# Altium PCB AdapterBoard.PcbDoc
Units mil, origin at the board's own origin, x right, y up, seen from the top; angles counter-clockwise.
Board outline 2007.09 x 1181.1 mil, 4 copper layers (Top Layer, Mid Layer 1, Mid Layer 2, Bottom Layer), stack 31.2 mil thick; 51 components, 29 nets, 160 pads, 131 vias.
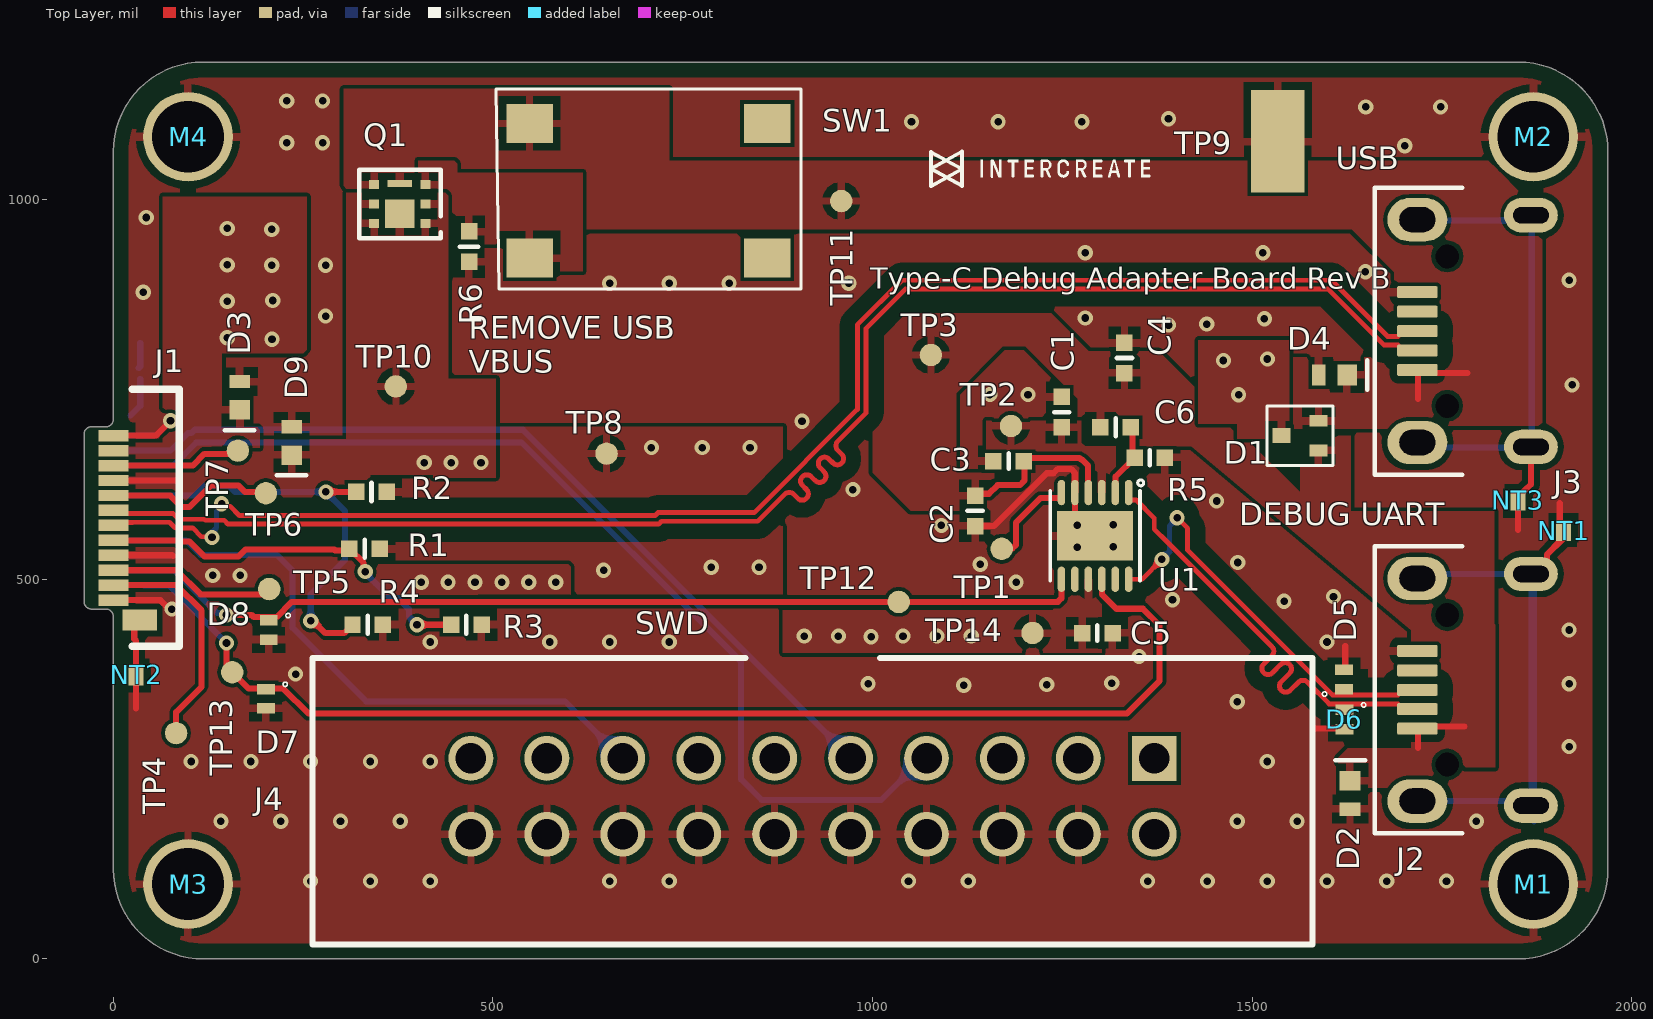
[diagram p0: Top Layer view]
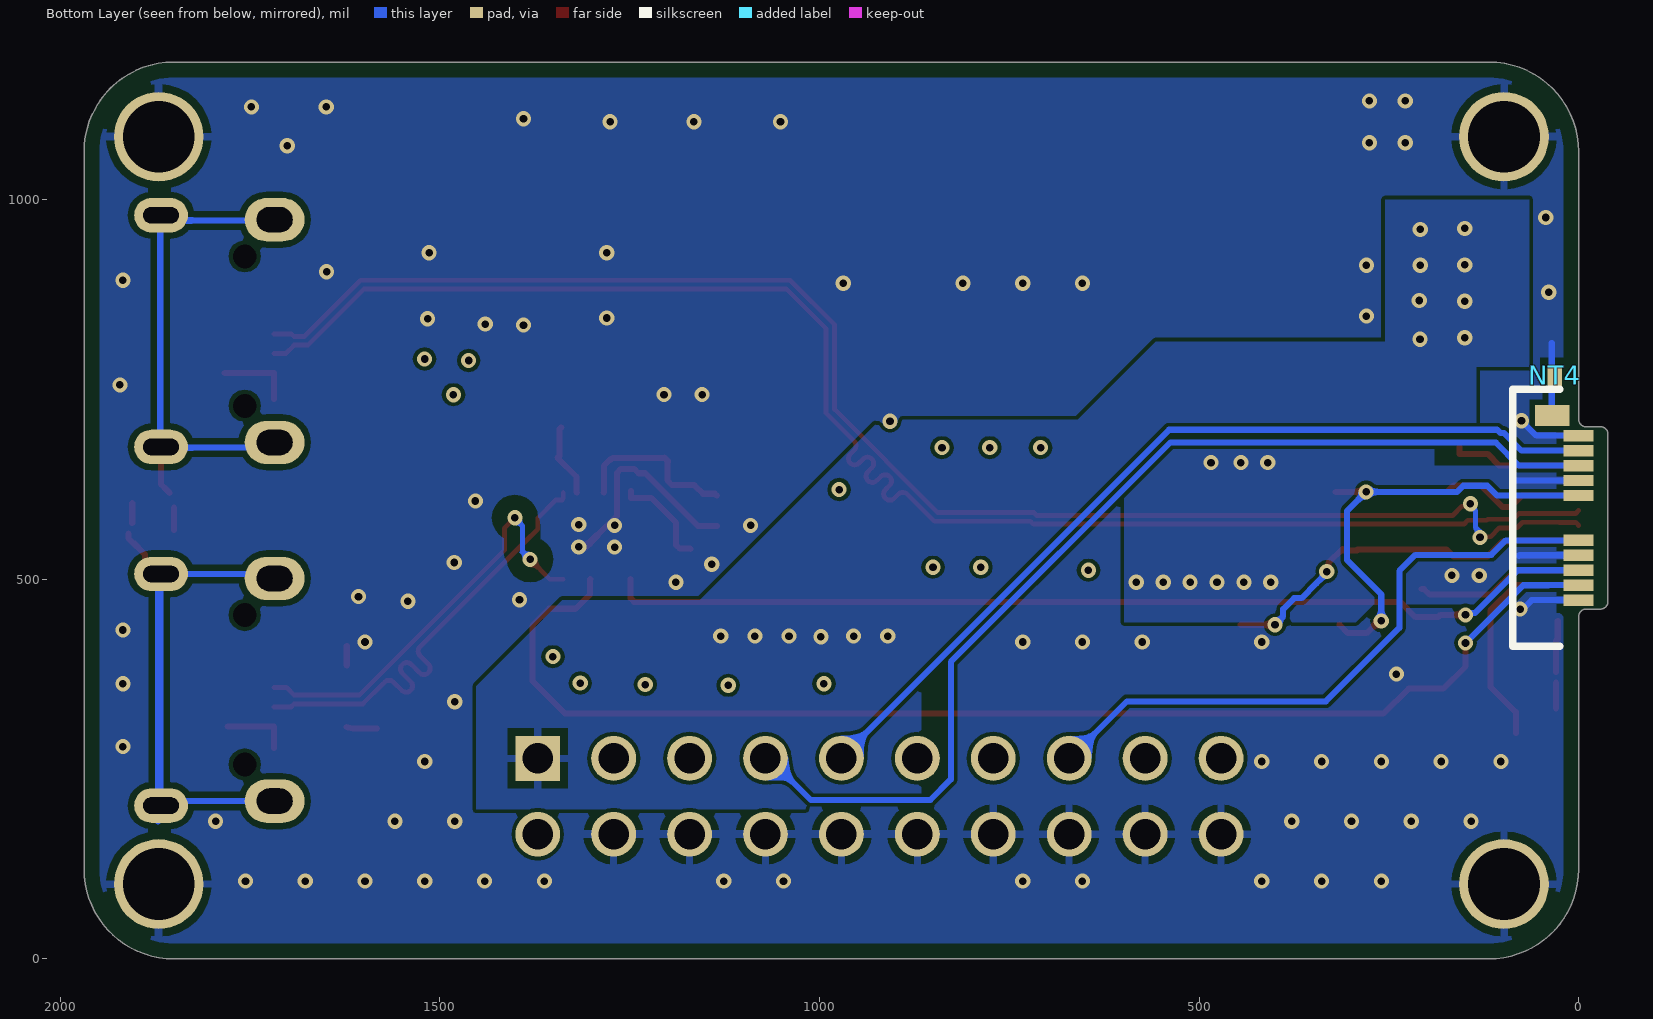
[diagram p1: Bottom Layer view, seen from below]
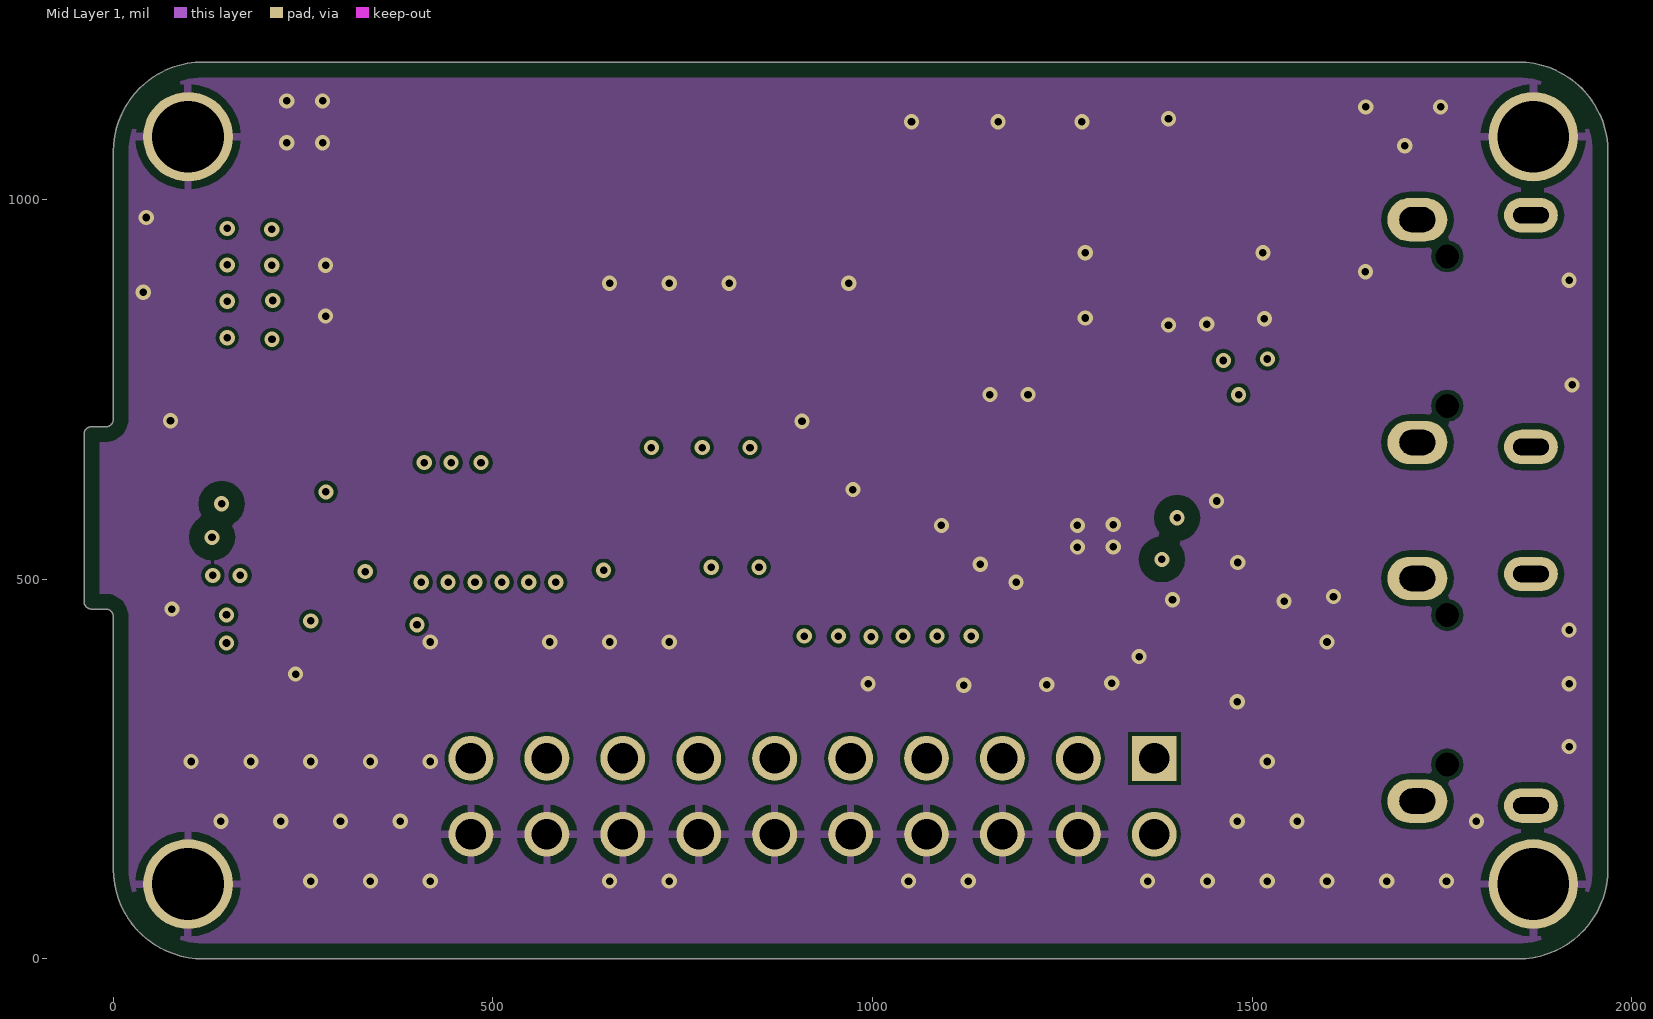
[diagram p2: Mid Layer 1]
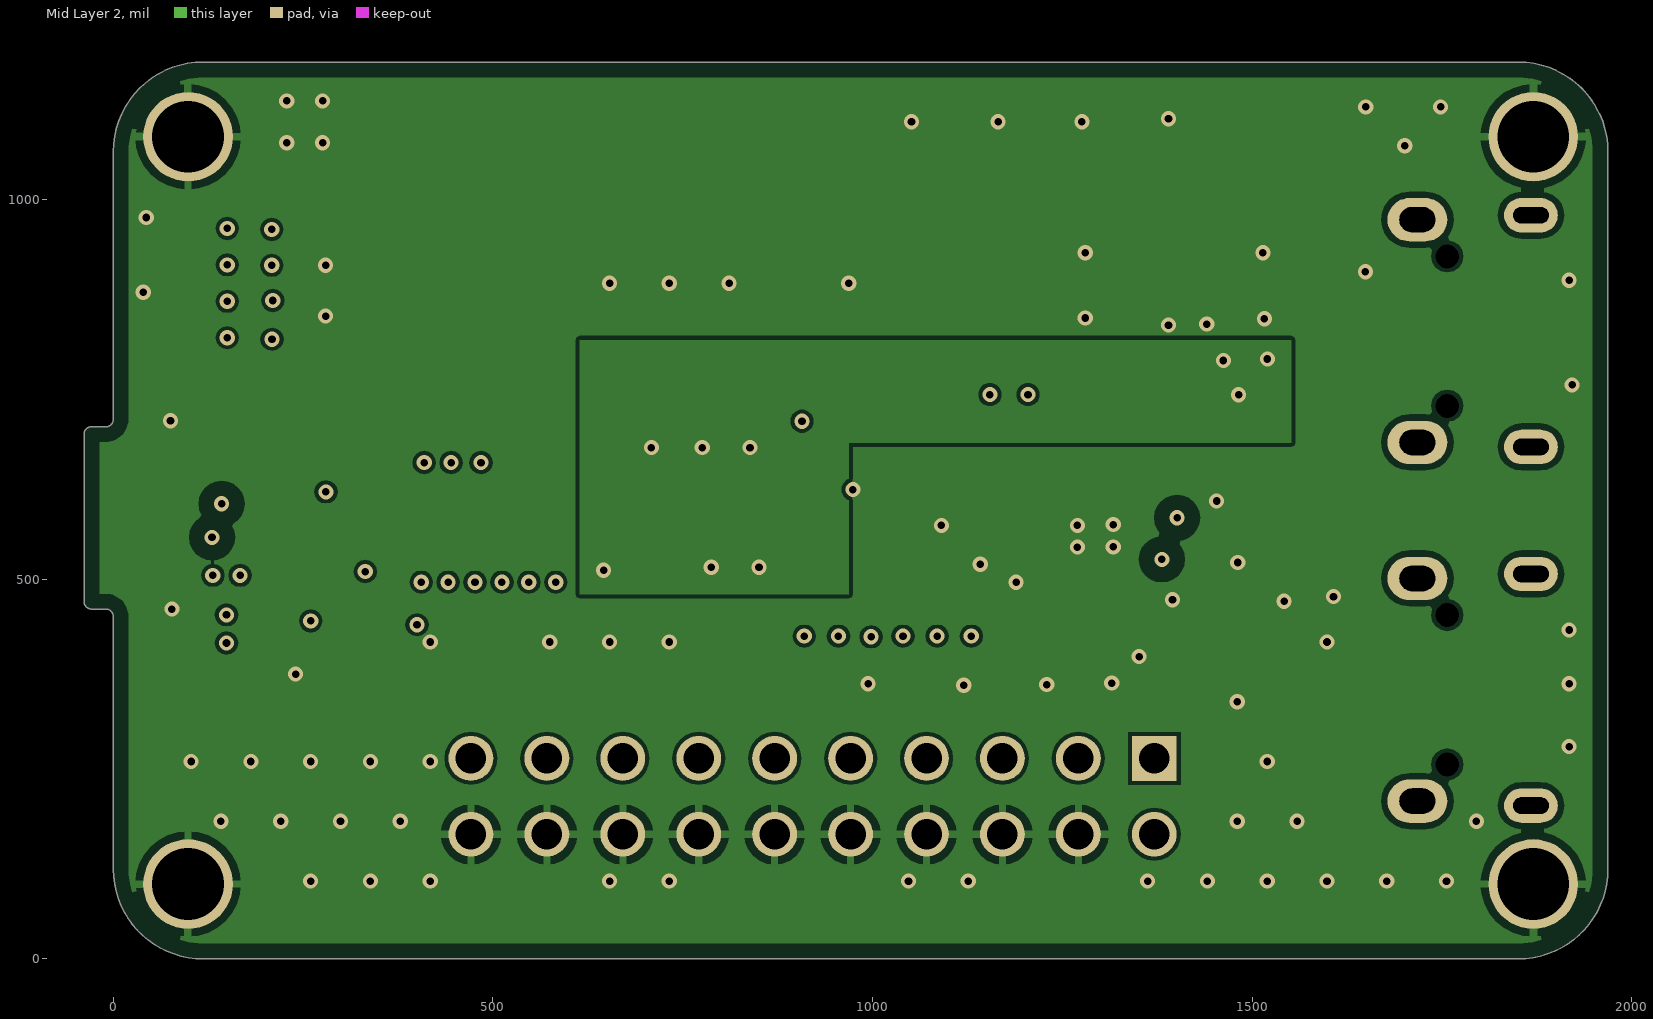
[diagram p3: Mid Layer 2]

## Layer stack, top to bottom
Top Solder: solder mask 0.6, Solder Resist, Dk 3.5
Top Layer: signal copper 1.9
Top Prepreg: prepreg 5.3, Dk 4.2
Mid Layer 1: signal copper 1.4
Bottom Core: core 14, Dk 4.2
Mid Layer 2: signal copper 1.4
Bottom Prepreg: prepreg 5.3, Dk 4.2
Bottom Layer: signal copper 1.9
Bottom Solder: solder mask 0.6, Solder Resist, Dk 3.5

## Board outline
-28.74,460.63 cw(c-28.74,470.47) -38.58,470.47 -38.58,690.94 cw(c-28.74,690.94) -28.74,700.79 -9.84,700.79 ccw(c-9.84,710.63) 0,710.63 0,1062.99 cw(c118.11,1062.99) 118.11,1181.1 1850.39,1181.1 cw(c1850.39,1062.99) 1968.5,1062.99 1968.5,118.11 cw(c1850.39,118.11) 1850.39,0 118.11,0 cw(c118.11,118.11) 0,118.11 0,450.79 ccw(c-9.84,450.79) -9.84,460.63

## Design rules (kind name [scope] priority, off if disabled: settings)
BoardOutlineClearance [All] p1: gap=20 ignorepadtopadclearanceinfootprint=FALSE except(4: SMDPad-OutlineEdge; 5: Text-OutlineEdge; 10: Track-OutlineEdge; 15: Arc-OutlineEdge)
Clearance Clearance_5 [InAnyDifferentialPair vs InPolygon] p1: gap=20 ignorepadtopadclearanceinfootprint=TRUE
Clearance Clearance_4 [InNet('NetJ1_ME2') vs InNet('GND')] p2: gap=8.03 ignorepadtopadclearanceinfootprint=TRUE except(0: Arc-SMDPad Track-SMDPad; 5: Arc-Arc Arc-Track Track-Track)
Clearance Clearance_3 [InNet('NetJ1_ME1') vs InNet('GND')] p3: gap=8.03 ignorepadtopadclearanceinfootprint=TRUE except(0: Arc-SMDPad Track-SMDPad; 5: Arc-Arc Arc-Track Track-Track)
Clearance Clearance_2 [InNet('NetJ2_6') vs InNet('GND')] p4: gap=8.03 ignorepadtopadclearanceinfootprint=TRUE except(0: Arc-SMDPad Track-SMDPad; 5: Arc-Arc Arc-Track Track-Track)
Clearance Clearance_1 [InNet('NetJ3_6') vs InNet('GND')] p5: gap=8.03 ignorepadtopadclearanceinfootprint=TRUE except(0: Arc-SMDPad Track-SMDPad; 5: Arc-Arc Arc-Track Track-Track)
Clearance [All] p6: gap=5 ignorepadtopadclearanceinfootprint=TRUE
DiffPairsRouting [InDifferentialPairClass('All Differential Pairs')] p1: maxlimit=5 minlimit=5 mostfreqgap=5 toplayer_minwidth=6.43 toplayer_maxwidth=6.43 toplayer_prefwidth=6.43 midlayer1_minwidth=3.68 midlayer1_maxwidth=3.68 midlayer1_prefwidth=3.68 midlayer2_minwidth=3.68 midlayer2_maxwidth=3.68 midlayer2_prefwidth=3.68 bottomlayer_minwidth=6.43 bottomlayer_maxwidth=6.43 bottomlayer_prefwidth=6.43 impedanceprofiledriven=TRUE impedanceprofileid={990C3832-9597-482B-A725-3B3A123B4834} impedanceprofilevalue=90.000000 maxuncoupledlength=500
HoleSize [All] p1: absolutevalues=TRUE maxlimit=196.85 minlimit=10 maxpercent=80.000 minpercent=20.000
MatchedLengths [InDifferentialPairClass('All Differential Pairs')] p1: tolerance=50 checknetsindiffpair=TRUE checkdiffpairvsdiffpair=FALSE checkxsignals=FALSE checkothers=FALSE
MaximumViaCount [InDifferentialPairClass('All Differential Pairs')] p1: limit=4
MinimumSolderMaskSliver [All] p1: minsoldermaskwidth=5
PlaneConnect [All] p1: pad.planeconnectstyle=Relief pad.reliefexpansion=20 pad.reliefentries=4 pad.reliefconductorwidth=10 pad.reliefairgap=10 via.planeconnectstyle=Direct via.reliefexpansion=20 via.reliefentries=4 via.reliefconductorwidth=10 via.reliefairgap=10
PolygonConnect [All] p1: thpad.connectstyle=Relief thpad.reliefconductorwidth=10 thpad.reliefentries=4 thpad.polygonreliefangle="90 Angle" thpad.airgapwidth=10 smdpad.connectstyle=Relief smdpad.reliefconductorwidth=10 smdpad.reliefentries=4 smdpad.polygonreliefangle="90 Angle" smdpad.airgapwidth=10 via.connectstyle=Direct via.reliefconductorwidth=10 via.reliefentries=4 via.polygonreliefangle="90 Angle" via.airgapwidth=10
RoutingVias [All] p1: holewidth=10 width=20 viastyle="Through Hole" minholewidth=10 minwidth=20 maxholewidth=19.68 maxwidth=50
ShortCircuit ShortCircuit_1 [InNet('NetJ3_6') vs InNet('GND')] p1: allowed=TRUE
ShortCircuit [All] p2: allowed=FALSE
SilkToSolderMaskClearance [IsPad] p1: minsilkscreentomaskgap=5 clearancetoexposedcopper=TRUE
SolderMaskExpansion [All] p1: expansion=4 istentingtop=FALSE
Width [All] p1: maxlimit=1000 minlimit=8.03 preferedwidth=10 midlayer1_maxwidth=10 midlayer2_maxwidth=10 minimp=50.000000 maximp=50.000000 favimp=50.000000
24 further rules are at their usual default settings.

## Classes and differential pairs
differential pair USB_TYPEC: +USB_TYPEC_P -USB_TYPEC_N
differential pair USB_FTDI: +USB_FTDI_P -USB_FTDI_N

## Components (designator, comment, footprint, x,y, rotation, side; value= is the part's Value field where it differs from the comment)
C1 "GRM155R71C104JA88D" CAP-0402 1249,720 r270 top value=0.1µF
C2 "CL05A475KP5NRNC" CAP-0402 1135,590 r90 top value=4.7µF
C3 "GRM155R71C104JA88D" CAP-0402 1179.13,655.51 r0 top value=0.1µF
C4 "GRM155R71C104JA88D" CAP-0402 1331.69,791.34 r270 top value=0.1µF
C5 "GRM155R71C104JA88D" CAP-0402 1296,429 r180 top value=0.1µF
C6 "GCM155R71H103KA55D" CAP-0402 1365,660 r180 top value=10nF
D1 "BAT54CT-TP" IC-SOT-523 1562.99,688.98 r270 top
D2 "DF2S6P2CTC,L3F" DIODE-CST2C 1629,214 r270 top
D3 "DF2S6P2CTC,L3F" DIODE-CST2C 166.45,743.63 r90 top
D4 "DF2S6P2CTC,L3F" DIODE-CST2C 1604.27,769 r180 top
D5 "RF2943-000" DIODE-0402-LITTLEFUSE 1620.81,367.78 r90 top
D6 "RF2943-000" DIODE-0402-LITTLEFUSE 1621.25,315.36 r270 top
D7 "RF2943-000" DIODE-0402-LITTLEFUSE 200.79,342.52 r270 top
D8 "RF2943-000" DIODE-0402-LITTLEFUSE 204.72,433.07 r270 top
D9 "DF2S6P2CTC,L3F" DIODE-CST2C 235,684 r90 top
J1 "105444-0001" CONN-M-USB-C 0,580.71 r90 top
J2 "629 105 150 521" CONN-R-USB-UB-629105150521 1822.83,354.33 r270 top
J3 "629 105 150 521" CONN-R-USB-UB-629105150521 1822.83,826.77 r270 top
J4 "SBH11-PBPC-D10-ST-BK" HDR-V-2x10-KEYED 921,214 r0 top
M1 "N/A" HOLE-M2-NO-SILK 1870.08,98.43 r0 top
M2 "N/A" HOLE-M2-NO-SILK 1870.08,1082.68 r0 top
M3 "N/A" HOLE-M2-NO-SILK 98.43,98.43 r0 top
M4 "N/A" HOLE-M2-NO-SILK 98.43,1082.68 r0 top
NT1 "NET TIE" NET_TIE 1910,563.94 r270 top net-tie
NT2 "NET TIE" NET_TIE 30,373.94 r90 top net-tie
NT3 "NET TIE" NET_TIE 1850,603.94 r90 top net-tie
NT4 "NET TIE" NET_TIE 31.46,768.38 r270 bottom net-tie
Q1 "SSM6J511NU,LF" FET-6-DFN-EP 377.13,994.06 r90 top
R1 "RT0402BRD0756KL" RES-0402 331,540 r180 top value=56kΩ
R2 "RT0402BRD0756KL" RES-0402 340,615 r180 top value=56kΩ
R3 "RT0402BRD0756KL" RES-0402 465,440 r0 top value=56kΩ
R4 "RT0402BRD0756KL" RES-0402 335,440 r0 top value=56kΩ
R5 "RT0402BRE0710KL" RES-0402 1320,700 r0 top value=10kΩ
R6 "RT0402BRD07100KL" RES-0402 468.5,937.99 r270 top value=100kΩ
SW1 "PTS645SK50SMTR92 LFS" BTN-SPST-PTS645SK50SMTR92 704.72,1011.81 r180 top
TP1 "N/A" TP-0.75MM 1170,540 r0 top
TP2 "N/A" TP-0.75MM 1182.25,701.77 r0 top
TP3 "N/A" TP-0.75MM 1076.77,795.28 r0 top
TP4 "N/A" TP-0.75MM 82.68,297.24 r0 top
TP5 "N/A" TP-0.75MM 205.26,486.97 r0 top
TP6 "N/A" TP-0.75MM 200.9,613.21 r0 top
TP7 "N/A" TP-0.75MM 164.04,669.31 r0 top
TP8 "N/A" TP-0.75MM 649.61,665.35 r0 top
TP9 "5015" TP-5015 1533.54,1076.69 r90 top
TP10 "N/A" TP-0.75MM 372.05,753.94 r0 top
TP11 "N/A" TP-0.75MM 958.66,998.03 r0 top
TP12 "N/A" TP-0.75MM 1034.36,470 r0 top
TP13 "N/A" TP-0.75MM 156.63,377.37 r0 top
TP14 "N/A" TP-0.75MM 1210.63,429.13 r0 top
U1 "FT234XD-T" IC-DFN-12P 1293,557 r270 top
? "Comment" ICON-INTERCREATE-SILK 1076.77,1017.72 r0 top

## Footprints (in the part's own frame and the unit in brackets; to place one, negate y for a bottom-side part, rotate by r counter-clockwise, add the part's x,y. Pads: shape width x height; smd on the part's side, far side on the other; paste and mask are expansions set on the pad)
BTN-SPST-PTS645SK50SMTR92 [mm]
  rect 1.55x1.3 smd: 1(-3.975,2.25) 2(3.975,2.25) 3(-3.975,-2.25) 4(3.975,-2.25)
  silkscreen extent -5.1,-3.4 5.1,3.3, body extent -4.5,-3 4.5,3, height 5.1
CAP-0402 [mm]
  rect 0.55x0.55 smd: 1(-0.508,0) 2(0.508,0)
  silkscreen extent 0,-0.25 0,0.25, body extent -0.5,-0.25 0.5,0.25, height 0.5
CONN-M-USB-C [mm]
  rect 0.38x1 smd: A1(-2.75,0) A2(-2.25,0) A3(-1.75,0) A4(-1.25,0) A5(-0.75,0) A6(-0.25,0) A7(0.25,0) A8(0.75,0) A9(1.25,0) A10(1.75,0) A11(2.25,0) A12(2.75,0)
  rect 0.38x1 smd far side: B1(2.75,0) B2(2.25,0) B3(1.75,0) B4(1.25,0) B5(0.75,0) B8(-0.75,0) B9(-1.25,0) B10(-1.75,0) B11(-2.25,0) B12(-2.75,0)
  rect 0.7x1.15 smd: ME1(-3.42,-0.88)
  rect 0.7x1.15 smd far side: ME2(3.42,-0.88)
  silkscreen extent -4.3,-2.2 4.3,-0.63, body extent -4.59,-1.04 4.59,11, height 1.51
CONN-R-USB-UB-629105150521 [mm]
  round 0.5 hole 0.8 unplated paste-10: 0(-2.5,-1.675) 0(2.5,-1.675)
  rrect20% 0.4x1.35 smd: 1(1.3,-2.675) 2(0.65,-2.675) 3(0,-2.675) 4(-0.65,-2.675) 5(-1.3,-2.675)
  oval 1.15x1.8 hole 0.55 slot 1.2 at 90 deg: 6(3.875,1.125) 7(-3.875,1.125)
  oval 1.45x2 hole 0.85 slot 1.2 at 90 deg: 8(3.725,-2.675) 9(-3.725,-2.675)
  silkscreen extent -4.8,-4.1 4.8,-1.17, body extent -4,-3.1 4,3.5, height 2.69
DIODE-0402-LITTLEFUSE [mm]
  rect 0.35x0.6 smd: 1(-0.325,0) 2(0.325,0)
  silkscreen extent -0.56,0.57 -0.41,0.72, body extent -0.5,-0.25 0.5,0.25, height 0.32
DIODE-CST2C [mm]
  rect 0.65x0.7 smd: 1(-0.525,0)
  rect 0.45x0.7 smd: 2(0.425,0)
  silkscreen extent -1.2,-0.49 -1.2,0.5, body extent -0.9,-0.4 0.7,0.4, height 0.5
FET-6-DFN-EP [mm]
  rect 0.3x0.325 smd: 1(-0.65,-0.865) 2(0,-0.865) 3(0.65,-0.865) 4(0.65,0.86) 5(0,0.86) 6(-0.65,0.86)
  rect 0.23x0.82 smd: 7(0.685,-0.003)
  rect 0.95x1 smd: 8(-0.326,-0.002)
  silkscreen extent -1.14,-1.37 1.14,1.35, body extent -1,-1 1,1, height 0.77
HDR-V-2x10-KEYED [mm]
  rect 1.5x1.5 hole 1.02: 1(11.43,1.27)
  round 1.5 hole 1.02: 2(11.43,-1.27) 3(8.89,1.27) 4(8.89,-1.27) 5(6.35,1.27) 6(6.35,-1.27) 7(3.81,1.27) 8(3.81,-1.27) 9(1.27,1.27) 10(1.27,-1.27) 11(-1.27,1.27) 12(-1.27,-1.27) 13(-3.81,1.27) 14(-3.81,-1.27) 15(-6.35,1.27) 16(-6.35,-1.27) 17(-8.89,1.27) 18(-8.89,-1.27) 19(-11.43,1.27) 20(-11.43,-1.27)
  silkscreen extent -16.73,-4.95 16.73,4.62, body extent -16.53,-4.75 16.53,4.42, height 9
HOLE-M2-NO-SILK [mm]
  round 3 hole 2.4: 1(0,0)
IC-DFN-12P [mm]
  oval 0.85x0.25 smd: 1(-1.45,1.125) 2(-1.45,0.675) 3(-1.45,0.225) 4(-1.45,-0.225) 5(-1.45,-0.675) 6(-1.45,-1.125) 7(1.45,-1.125) 8(1.45,-0.675) 9(1.45,-0.225) 10(1.45,0.225) 11(1.45,0.675) 12(1.45,1.125)
  rect 1.65x2.55 smd paste-2: 13(0,0)
  silkscreen extent -1.87,-1.5 1.5,1.63, body extent -1.5,-1.5 1.5,1.5, height 0.8
IC-SOT-523 [mm]
  rect 0.4x0.6 smd: 1(0.5,0.62) 2(-0.5,0.62)
  rect 0.5x0.6 smd: 3(0,-0.62)
  silkscreen extent -1,-1.1 1,1.1, body extent -0.8,-0.8 0.8,0.8, height 0.8
ICON-INTERCREATE-SILK [mil] "Intercreate Icon in Overlay"
  silkscreen extent 0,0 289,45
NET_TIE [mm] "Net Tie"
  rect 0.5x0.5 smd paste-0.5 mask-0.5: 1(-0.1,0) 2(0.1,0)
RES-0402 [mm]
  rect 0.55x0.55 smd: 1(-0.508,0) 2(0.508,0)
  silkscreen extent 0,-0.3 0,0.3, body extent -0.58,-0.27 0.57,0.27, height 0.41
TP-0.75MM [mm]
  round 0.75 smd paste-0.5: 1(0,0)
TP-5015 [mm]
  rect 3.43x1.78 smd paste-1: 1(0,0)
  body extent -1.33,-0.45 1.33,0.57, height 1.52

## Part data
C1 C3 C4 C5: library part CAP-0.1uF-16V-0402, "CAP CER 0.1UF 16V X7R 0402 5%", Capacitance=100nF, Case Code (Imperial)=0402, Case Code (Metric)=1005, Dielectric=X7R, Manufacturer=Murata, Max Operating Temperature=125°C, Min Operating Temperature=-55°C, Package Quantity=10000, Supplier Part Number 1=490-6327-6-ND, Tolerance=±5%, Voltage=16V, Case/Package=0402, ComponentLink1Description=http://www.mouser.com/ds/2/281/c02e-2905.pdf, ComponentLink1URL=http://www.mouser.com/ds/2/281/c02e-2905.pdf, ComponentLink2Description=http://www.murata.com/products/catalog/pdf/c02e.pdf, ComponentLink2URL=http://www.murata.com/products/catalog/pdf/c02e.pdf, ComponentLink3Description=http://search.murata.co.jp/Ceramy/image/img/A01X/G101/ENG/GRM155R71C104JA88-01.pdf, ComponentLink3URL=http://search.murata.co.jp/Ceramy/image/img/A01X/G101/ENG/GRM155R71C104JA88-01.pdf, Depth=0.5mm, Height=0.5mm, Lead Free="Lead Free", Length=1mm, Manufacturer 1=Murata, Manufacturer Part Number 1=GRM155R71C104JA88D, Mount="Surface Mount", MPN=GRM155R71C104JA88D, Packaging="Tape and Reel", Pricing 1="1=0.1, 10=0.051, 100=0.0225, 500=0.0161, 1000=0.01265, 2500=0.0115, 5000=0.01058 (USD)", Radiation Hardening=No, REACH SVHC="No SVHC", Stock 1=100000, Supplier 1=Digi-Key, Termination=SMD/SMT, Thickness=0.022inch, Voltage Rating=16V, Voltage Rating (DC)=16V, Width=0.02inch
C2: library part CAP-4.7uF-10V-0402, "CAP CER 4.7UF 10V X5R 0402 10%", Case Code (Imperial)=0402, Case Code (Metric)=1005, Manufacturer=Samsung, Max Operating Temperature=85°C, Min Operating Temperature=-55°C, Supplier Part Number 1=1276-1480-1-ND, Tolerance=±10%, Voltage Rating=10V, Case/Package=0402, Length=0.039inch, Manufacturer 1=Samsung, Manufacturer Part Number 1=CL05A475KP5NRNC, Mount="Surface Mount", MPN=CL05A475KP5NRNC, Packaging="Cut Tape", Supplier 1=Digi-Key, Thickness=0.031inch, Width=0.02inch
C6: library part CAP-10nF-50V-0402, "CAP CER 10nF 50V X7R 0402 10%", Case Code (Imperial)=0402, Case Code (Metric)=1005, Dielectric=X7R, Manufacturer=Murata, Max Operating Temperature=125°C, Min Operating Temperature=-55°C, Package Quantity=1, Ratings=AEC-Q200, Supplier Part Number 1=490-4762-1-ND, Tolerance=±10%, Voltage=50V, Case/Package=0402, Depth=0.5mm, Height=0.5mm, Lead Free="Lead Free", Length=1mm, Manufacturer 1=Murata, Manufacturer Part Number 1=GCM155R71H103KA55D, Mount="Surface Mount", MPN=GCM155R71H103KA55D, Packaging="Tape and Reel", Pricing 1="1=0.1, 10=0.048, 100=0.0215, 500=0.01538, 1000=0.01208, 2500=0.01098, 5000=0.0101 (USD)", Radiation Hardening=No, REACH SVHC="No SVHC", Stock 1=100000, Supplier 1=Digi-Key, Termination=SMD/SMT, Thickness=0.022inch, Voltage Rating=50V, Voltage Rating (DC)=50V, Width=0.02inch
D1: library part DIODE-SCHOTTKY-30V-BAT54CT, "DIODE ARRAY SCHOTTKY 30V SOT523", Average Rectified Current=200mA, Capacitance=10pF, Case/Package=SOT-523, Forward Voltage=1V, Manufacturer 1=MCC, Max Forward Surge Current (Ifsm)=600mA, Max Operating Temperature=125°C, Max Repetitive Reverse Voltage (Vrrm)=30V, Max Reverse Leakage Current=2uA, Min Operating Temperature=-65°C, Package Quantity=1, Supplier Part Number 1=BAT54CT-TPCT-ND, Category="Rectifier Diodes", ComponentLink1Description=https://datasheet.ciiva.com/7624/1684805-7624706.pdf?src-supplier=Element14, ComponentLink1URL=https://datasheet.ciiva.com/7624/1684805-7624706.pdf?src-supplier=Element14, ComponentLink2Description=https://datasheet.ciiva.com/15200/getdatasheetpartid-302124-15200436.pdf?src-supplier=Verical, ComponentLink2URL=https://datasheet.ciiva.com/15200/getdatasheetpartid-302124-15200436.pdf?src-supplier=Verical, ComponentLink3Description=https://datasheet.ciiva.com/904/bat54t-at-ct-stsot-523-904754.pdf?src-supplier=Digi-Key, ComponentLink3URL=https://datasheet.ciiva.com/904/bat54t-at-ct-stsot-523-904754.pdf?src-supplier=Digi-Key, ComponentLink4Description=https://datasheet.ciiva.com/904/bat54t-at-ct-stsot-523-904755.pdf?src-supplier=Digi-Key, ComponentLink4URL=https://datasheet.ciiva.com/904/bat54t-at-ct-stsot-523-904755.pdf?src-supplier=Digi-Key, ComponentLink5Description=https://datasheet.ciiva.com/904/bat54t-at-ct-stsot-523-904756.pdf?src-supplier=Digi-Key, ComponentLink5URL=https://datasheet.ciiva.com/904/bat54t-at-ct-stsot-523-904756.pdf?src-supplier=Digi-Key, Current Rating=200mA, Element Configuration="Common Cathode", Forward Current=200mA, Lead Free="Lead Free", Manufacturer Part Number 1=BAT54CT-TP, Max Reverse Voltage (DC)=30V, Max Surge Current=600mA, Mount="Surface Mount", Number of Pins=3, Packaging="Tape and Reel", Peak Non-Repetitive Surge Current=600mA, Pricing 1="1=0.26000, 10=0.18000, 100=0.08800, 500=0.07340, 1000=0.05100 (USD)", Radiation Hardening=No, REACH SVHC=Unknown, Recovery Time=5ns, Reverse Recovery Time=5ns, RoHS=Yes, Stock 1=52882, Supplier 1=Digi-Key, Voltage Rating (DC)=30V
D2 D3 D4 D9: library part DIODE-TVS-5.5V-CST2C, "TVS DIODE 5.5VWM CST2C", Manufacturer 1=Toshiba, Reverse Standoff Voltage=5.5V, Supplier Part Number 1=DF2S6P2CTCL3FCT-ND, ComponentLink1Description=https://toshiba.semicon-storage.com/info/docget.jsp?did=58602&prodName=DF2S6P2CTC&src-supplier=Digi-Key, ComponentLink1URL=https://toshiba.semicon-storage.com/info/docget.jsp?did=58602&prodName=DF2S6P2CTC&src-supplier=Digi-Key, Manufacturer Part Number 1=DF2S6P2CTC,L3F, Pricing 1="1=0.41000, 10=0.30800, 25=0.27760, 100=0.19180, 250=0.16152, 500=0.13122, 1000=0.10094, 2500=0.09085, 5000=0.08580 (USD)", RoHS=No, Stock 1=14024, Supplier 1=Digi-Key
D5 D6 D7 D8: library part DIODE-TVS-7V-0402, "TVS DIODE 7V 9.2V 0402/2DFN", Breakdown Voltage=9V, Case Code (Imperial)=0402, Case Code (Metric)=1005, Clamping Voltage=9.2V, Manufacturer 1=Littelfuse, Max Operating Temperature=125°C, Max Surge Current=2A, Min Operating Temperature=-55°C, Package Quantity=10000, Power Line Protection=No, Resistor Type=Zener, Reverse Standoff Voltage=7V, Supplier Part Number 1=SESD0402X1UN-0020-090CT-ND, Case/Package=0402, Category="TVS Diodes", ComponentLink1Description=http://www.littelfuse.com/~/media/electronics/datasheets/tvs_diode_arrays/littelfuse_tvs_diode_array_sesd_ultra_low_capacitance_discrete_tvs_datasheet.pdf.pdf?src-supplier=Digi-Key, ComponentLink1URL=http://www.littelfuse.com/~/media/electronics/datasheets/tvs_diode_arrays/littelfuse_tvs_diode_array_sesd_ultra_low_capacitance_discrete_tvs_datasheet.pdf.pdf?src-supplier=Digi-Key, ComponentLink2Description=https://www.littelfuse.com/~/media/electronics/datasheets/tvs_diode_arrays/littelfuse_tvs_diode_array_sesd_ultra_low_capacitance_discrete_tvs_datasheet.pdf.pdf?src-supplier=Digi-Key, ComponentLink2URL=https://www.littelfuse.com/~/media/electronics/datasheets/tvs_diode_arrays/littelfuse_tvs_diode_array_sesd_ultra_low_capacitance_discrete_tvs_datasheet.pdf.pdf?src-supplier=Digi-Key, Manufacturer Part Number 1=RF2943-000, Min Breakdown Voltage=9V, Mount="Surface Mount", Number of Pins=2, Number of Unidirectional Channels=1, Packaging="Tape and Reel", Peak Pulse Current=2A, Polarity=Unidirectional, Pricing 1="1=0.53000, 10=0.45000, 100=0.31200, 500=0.24360, 1000=0.19800, 2000=0.18600, 5000=0.16800 (USD)", RoHS=No, Stock 1=59677, Supplier 1=Digi-Key, Termination=SMD/SMT, Working Voltage=9V
J1: library part CONN-M-USB-C, "105444-0001 Male USB C Connector, Right Angle Surface Mount", Current Rating=5A, Flammability Rating="UL94 V-0", Insulation Color=Black, Manufacturer 1=Molex, Max Operating Temperature=85°C, Min Operating Temperature=-30°C, Supplier Part Number 1=WM12855-ND, ComponentLink1Description=http://www.molex.com/pdm_docs/sd/1054440001_sd.pdf?src-supplier=Avnet+Asia, ComponentLink1URL=http://www.molex.com/pdm_docs/sd/1054440001_sd.pdf?src-supplier=Avnet+Asia, ComponentLink2Description=http://www.literature.molex.com/SQLImages/kelmscott/Molex/PDF_Images/987651-4081.PDF?src-supplier=Digi-Key, ComponentLink2URL=http://www.literature.molex.com/SQLImages/kelmscott/Molex/PDF_Images/987651-4081.PDF?src-supplier=Digi-Key, ComponentLink3Description=http://www.molex.com/pdm_docs/sd/1054440001_sd.pdf?src-supplier=Avnet, ComponentLink3URL=http://www.molex.com/pdm_docs/sd/1054440001_sd.pdf?src-supplier=Avnet, ComponentLink4Description=http://www.farnell.com/datasheets/2015275.pdf?src-supplier=Element14, ComponentLink4URL=http://www.farnell.com/datasheets/2015275.pdf?src-supplier=Element14, ComponentLink5Description=http://datasheet.octopart.com/105444-0001-Molex-datasheet-120135262.pdf?src-supplier=Allied+Electronics, ComponentLink5URL=http://datasheet.octopart.com/105444-0001-Molex-datasheet-120135262.pdf?src-supplier=Allied+Electronics, ComponentLink6Description=http://datasheet.octopart.com/1054440001-Molex-datasheet-137325544.pdf?src-supplier=Sager+Electronics, ComponentLink6URL=http://datasheet.octopart.com/1054440001-Molex-datasheet-137325544.pdf?src-supplier=Sager+Electronics, ComponentLink7Description=http://datasheet.octopart.com/105444-0001-Molex-datasheet-62118242.pdf?src-supplier=Farnell, ComponentLink7URL=http://datasheet.octopart.com/105444-0001-Molex-datasheet-62118242.pdf?src-supplier=Farnell, ComponentLink8Description=http://datasheet.octopart.com/105444-0001-Molex-datasheet-77519197.pdf?src-supplier=Newark, ComponentLink8URL=http://datasheet.octopart.com/105444-0001-Molex-datasheet-77519197.pdf?src-supplier=Newark, ComponentLink9Description=http://datasheet.octopart.com/105444-0001-Molex-datasheet-62099280.pdf?src-supplier=Allied+Electronics, ComponentLink9URL=http://datasheet.octopart.com/105444-0001-Molex-datasheet-62099280.pdf?src-supplier=Allied+Electronics, ComponentLink10Description=http://datasheet.octopart.com/105444-0001-Molex-datasheet-62268959.pdf?src-supplier=Newark, ComponentLink10URL=http://datasheet.octopart.com/105444-0001-Molex-datasheet-62268959.pdf?src-supplier=Newark, Connector Type=USB, Contact Material="Copper Alloy", Contact Plating=Gold, Features=Shielded, Gender=Male, Housing Material=Thermoplastic, Length=9.18mm, Manufacturer Part Number 1=105444-0001, Mating Cycles=10000, Mount="Straddle Mount", Number of Contacts=24, Number of Ports=1, Number of Terminals=22, Orientation="Right Angle", Packaging=Tray, Pitch=0.5mm, Pricing 1="1=2.66000, 10=2.41100, 25=2.26320, 50=2.16480, 100=2.06640, 250=1.86960, 500=1.72200, 1000=1.47600, 2500=1.37760 (USD)", REACH SVHC=Unknown, Shielding=Shielded, Stock 1=6718, Supplier 1=Digi-Key, Termination=Solder, USB Standard="USB 3.1"
J2 J3: "CONN RCPT USB MICRO B R/A", Manufacturer 1="Wurth Electronics", ComponentLink1Description=Datasheet, ComponentLink1URL=http://katalog.we-online.de/em/datasheet/629105150521.pdf, Connector Type="USB - micro B", Contact Finish=Gold, Manufacturer Part Number 1="629 105 150 521", Mounting Type="Surface Mount", Number of Positions=5, Number of Rows=1, Series=WR-COM, Supplier 1="Wurth Electronics", Supplier Part Number 1="629 105 150 521", Termination=Solder
J4: library part HDR-V-2x10-M, "CONN HEADER VERT 20POS 2.54MM", Color=Black, Manufacturer 1=Sullins, Package Quantity=1, Supplier Part Number 1=S9172-ND, ComponentLink1Description=https://datasheet.ciiva.com/730/sbh11-pbpc-dxx-st-xx-730919.pdf?src-supplier=Digi-Key, ComponentLink1URL=https://datasheet.ciiva.com/730/sbh11-pbpc-dxx-st-xx-730919.pdf?src-supplier=Digi-Key, Connector Type="Male Pin", Contact Plating=Gold, Lead Free="Lead Free", Manufacturer Part Number 1=SBH11-PBPC-D10-ST-BK, Mount="Through Hole", Number of Positions=20, Number of Rows=2, Packaging=Tray, Pitch=0.1inch, Pricing 1="1=0.54000, 10=0.51000, 100=0.39120, 500=0.34020, 1000=0.28067, 5000=0.24665, 10000=0.24570 (USD)", RoHS=Yes, Row Spacing=0.1inch, Stock 1=23438, Supplier 1=Digi-Key, Termination=Solder
M1 M2 M3 M4: library part HOLE, "MOUNTING HOLES, VARIOUS DIAMETERS", Manufacturer=N/A, MPN=N/A
Q1: library part PMOS-12V-14A-UDFN6, "MOSFET P-CH 12V 14A UDFN6B", Continuous Drain Current (ID)=14A, Drain to Source Voltage (Vdss)=12V, Input Capacitance=3.35nF, Manufacturer=Toshiba, Max Operating Temperature=150°C, Max Power Dissipation=1.25W, Min Operating Temperature=-55°C, Supplier Part Number 1=SSM6J511NULFCT-ND, ComponentLink1Description=https://toshiba.semicon-storage.com/info/docget.jsp?did=30767&prodName=SSM6J511NU, ComponentLink1URL=https://toshiba.semicon-storage.com/info/docget.jsp?did=30767&prodName=SSM6J511NU, Manufacturer 1=Toshiba, Manufacturer Part Number 1=SSM6J511NU,LF, Mount="Surface Mount", MPN=SSM6J511NU,LF, Packaging="Cut Tape", Pricing 1="1=0.63, 10=0.495, 100=0.34, 500=0.2331, 1000=0.17483 (USD)", Rds On Max=9.1mR, Stock 1=10609, Supplier 1=Digi-Key
R1 R2 R3 R4: "RES SMD 56K OHM 0.1% 1/16W 0402", Case Code (Imperial)=0402, Case Code (Metric)=1005, Manufacturer 1=Yageo, Manufacturer Part Number 1=RC0402FR-0717K4L, Max Operating Temperature=155°C, Max Power Dissipation=63mW, Min Operating Temperature=-55°C, Package Quantity=1, Power Rating=62.5mW, Resistance=56kR, Supplier Part Number 1=YAG1454CT-ND, Temperature Coefficient=100ppm/°C, Tolerance=0.1%, Voltage Rating=50V, Case/Package=0402, ComponentLink1Description=https://datasheet.ciiva.com/2453/pyu-r-int-thick-7-2453648.pdf?src-supplier=Digi-Key, ComponentLink1URL=https://datasheet.ciiva.com/2453/pyu-r-int-thick-7-2453648.pdf?src-supplier=Digi-Key, ComponentLink2Description=https://datasheet.ciiva.com/26829/getdatasheetpartid-329233-26829932.pdf?src-supplier=Verical, ComponentLink2URL=https://datasheet.ciiva.com/26829/getdatasheetpartid-329233-26829932.pdf?src-supplier=Verical, ComponentLink3Description=https://datasheet.ciiva.com/2453/pyu-r-int-thick-7-2453646.pdf?src-supplier=Digi-Key, ComponentLink3URL=https://datasheet.ciiva.com/2453/pyu-r-int-thick-7-2453646.pdf?src-supplier=Digi-Key, ComponentLink4Description=https://datasheet.ciiva.com/2453/pyu-r-int-thick-7-2453647.pdf?src-supplier=Digi-Key, ComponentLink4URL=https://datasheet.ciiva.com/2453/pyu-r-int-thick-7-2453647.pdf?src-supplier=Digi-Key, Composition="Thick Film", Depth=0.5mm, Features="Moisture Resistant", Height=0.016inch, Lead Free="Lead Free", Length=1mm, Military Standard=Not, Number of Terminations=2, Packaging="Tape and Reel", Pricing 1="1=0.10000, 10=0.01600, 100=0.00670, 1000=0.00301, 2500=0.00261, 5000=0.00215 (USD)", RoHS=Yes, Stock 1=1340786, Supplier 1=Digi-Key, Termination=SMD/SMT, Voltage Rating (DC)=50V, Width=0.02inch, Working Voltage=50V
R5: library part RES-10K-0402-0.1%, "RES SMD 10K OHM 0.1% 1/16W 0402", Case Code (Imperial)=0402, Case Code (Metric)=1005, Manufacturer 1=Yageo, Max Operating Temperature=125°C, Max Power Dissipation=63mW, Min Operating Temperature=-55°C, Package Quantity=10000, Power Rating=62.5mW, Resistance=10kR, Supplier Part Number 1=YAG2305CT-ND, Temperature Coefficient=50ppm/°C, Tolerance=0.1%, Voltage Rating=50V, Case/Package=0402, Category="Chip SMD Resistors", ComponentLink1Description=https://datasheet.ciiva.com/2582/pyu-rt-1-to-0-05-rohs-l-5-2582552.pdf?src-supplier=Digi-Key, ComponentLink1URL=https://datasheet.ciiva.com/2582/pyu-rt-1-to-0-05-rohs-l-5-2582552.pdf?src-supplier=Digi-Key, ComponentLink2Description=https://datasheet.ciiva.com/12722/pyu-rt-1-to-0-05-rohs-l-4-12722271.pdf?src-supplier=Mouser, ComponentLink2URL=https://datasheet.ciiva.com/12722/pyu-rt-1-to-0-05-rohs-l-4-12722271.pdf?src-supplier=Mouser, Composition="Thin Film", Depth=0.5mm, Features="Moisture Resistant", Height=0.014inch, Lead Free="Lead Free", Length=0.039inch, Manufacturer Part Number 1=RT0402BRE0710KL, Military Standard=Not, Number of Terminations=2, Packaging="Tape and Reel", Pricing 1="1=0.39000, 10=0.27800, 100=0.11130, 1000=0.05484, 2500=0.05081, 5000=0.04597 (USD)", RoHS=Yes, Stock 1=18470, Supplier 1=Digi-Key, Termination=SMD/SMT, Voltage Rating (DC)=50V, Width=0.02inch, Working Voltage=50V
R6: library part RES-100K-0402-0.1%, "RES SMD 100KOHM 0.1% 1/16W 0402", Case Code (Imperial)=0402, Case Code (Metric)=1005, Manufacturer 1=Yageo, Max Operating Temperature=125°C, Max Power Dissipation=63mW, Min Operating Temperature=-55°C, Power Rating=62.5mW, Resistance=100kR, Supplier Part Number 1=YAG1343CT-ND, Temperature Coefficient=25ppm/°C, Tolerance=0.1%, Voltage Rating=50V, Case/Package=0402, ComponentLink1Description=https://datasheet.ciiva.com/12724/pyu-rt-1-to-0-05-rohs-l-4-12724954.pdf?src-supplier=Mouser, ComponentLink1URL=https://datasheet.ciiva.com/12724/pyu-rt-1-to-0-05-rohs-l-4-12724954.pdf?src-supplier=Mouser, Composition="Thin Film", Depth=0.5mm, Features="Moisture Resistant", Height=0.014inch, Lead Free="Lead Free", Length=0.039inch, Manufacturer Part Number 1=RT0402BRD07100KL, Military Standard=Not, Number of Terminations=2, Packaging="Tape and Reel", Pricing 1="1=0.38000, 10=0.29000, 100=0.12180, 1000=0.06720, 2500=0.06300, 5000=0.05800 (USD)", RoHS=Yes, Stock 1=220537, Supplier 1=Digi-Key, Termination=SMD/SMT, Voltage Rating (DC)=50V, Width=0.02inch
SW1: library part BTN-SPST-PTS645SK50SMTR92, "C & K COMPONENTS - PTS645SK50SMTR92LFS - SWITCH, SPST, 0.05A, 12VDC, SMD, 5MM", Case/Package=SMD/SMT, Color=Red, Contact Resistance=100mR, Current Rating=50mA, Manufacturer 1="ITT C&K", Manufacturer Part Number 1=PTS645SK50SMTR92LFS, Max Operating Temperature=60°C, Max Voltage Rating (DC)=12V, Min Operating Temperature=-20°C, Operating Force=260gf, Package Quantity=1, Supplier Part Number 1=CKN9087CT-ND, Actuator Length=1.55mm, Actuator Material=Nylon,Polyamide,PA66, Actuator Type=Standard, Category="Tactile Switches", ComponentLink1Description=https://datasheet.ciiva.com/29903/getdatasheetpartid-741134-29903854.pdf?src-supplier=Verical, ComponentLink1URL=https://datasheet.ciiva.com/29903/getdatasheetpartid-741134-29903854.pdf?src-supplier=Verical, ComponentLink2Description=https://datasheet.ciiva.com/14920/pts645-14920581.pdf?src-supplier=Digi-Key, ComponentLink2URL=https://datasheet.ciiva.com/14920/pts645-14920581.pdf?src-supplier=Digi-Key, ComponentLink3Description=https://datasheet.ciiva.com/22637/1707731-22637358.pdf?src-supplier=Element14, ComponentLink3URL=https://datasheet.ciiva.com/22637/1707731-22637358.pdf?src-supplier=Element14, Contact Material=Bronze, Contact Plating=Silver, Depth=9mm, Illumination Type=Non-Illuminated,Illuminated, Lead Free="Lead Free", Length=6mm, Max Current Rating=50mA, Mechanical Life=100000Cycles, Mount="Surface Mount", Orientation=Straight, Packaging="Tape and Reel", Pricing 1="1=0.15000, 10=0.14900, 25=0.14120, 100=0.12840, 250=0.12068, 500=0.11042 (USD)", REACH SVHC="No SVHC", RoHS=Yes, RoHS Compliant=Yes, Series=PTS645, Stock 1=52601, Supplier 1=Digi-Key, Switch Function=Off-Mom, Termination="Gull Wing", Throw Configuration=SPST, Voltage Rating (DC)=12V
TP1 TP2 TP3 TP4 TP5 TP6 TP7 TP8 TP10 TP11 TP12 TP13 TP14: library part TP, "TESTPOINT - VARIOUS SHAPES", Manufacturer=N/A, MPN=N/A
TP9: library part TP-5015, "PC TEST POINT MINIATURE", Color=White, Manufacturer 1="Keystone Electronics", Package Quantity=1, Supplier Part Number 1=36-5015CT-ND, ComponentLink1Description=https://datasheet.ciiva.com/1123/5015-1123862.pdf?src-supplier=Newark, ComponentLink1URL=https://datasheet.ciiva.com/1123/5015-1123862.pdf?src-supplier=Newark, ComponentLink2Description=https://datasheet.ciiva.com/2917/5015-2917616.pdf?src-supplier=Digi-Key, ComponentLink2URL=https://datasheet.ciiva.com/2917/5015-2917616.pdf?src-supplier=Digi-Key, ComponentLink3Description=https://datasheet.ciiva.com/2917/5015-2917617.pdf?src-supplier=Digi-Key, ComponentLink3URL=https://datasheet.ciiva.com/2917/5015-2917617.pdf?src-supplier=Digi-Key, ComponentLink4Description=https://datasheet.ciiva.com/16883/70182998-16883734.pdf?src-supplier=Allied+Electronics, ComponentLink4URL=https://datasheet.ciiva.com/16883/70182998-16883734.pdf?src-supplier=Allied+Electronics, Contact Material=Bronze, Contact Plating=Silver,Tin,Lead, Depth=1.01mm, Height=0.06inch, Lead Free="Lead Free", Length=2.66mm, Manufacturer Part Number 1=5015, Material=Bronze,Silver, Mount="Surface Mount", Number of Ports=1, Orientation=Straight, Packaging="Tape and Reel", Pricing 1="1=0.35000, 10=0.34400, 25=0.32760, 100=0.24740, 250=0.23676, 500=0.21908 (USD)", REACH SVHC="No SVHC", RoHS=Yes, Stock 1=1261126, Supplier 1=Digi-Key, Termination=Solder, Thickness=0.01inch
U1: library part IC-USB-FTDI-FT234XD, "USB Full Speed to Basic UART IC with USB Charger Detection", Case/Package=DFN, Manufacturer 1=FTDI, Max Operating Temperature=85°C, Max Supply Voltage=5.5V, Min Operating Temperature=-40°C, Min Supply Voltage=2.97V, Operating Supply Current=8mA, Operating Supply Voltage=5.25V, Package Quantity=490, Supplier Part Number 1=768-1345-ND, Category="Interface ICs", ComponentLink1Description=https://datasheet.ciiva.com/12096/ds-ft234xd-220088-12096048.pdf?src-supplier=Mouser, ComponentLink1URL=https://datasheet.ciiva.com/12096/ds-ft234xd-220088-12096048.pdf?src-supplier=Mouser, ComponentLink2Description=https://datasheet.ciiva.com/49014/70403923-49014570.pdf?src-supplier=Allied+Electronics, ComponentLink2URL=https://datasheet.ciiva.com/49014/70403923-49014570.pdf?src-supplier=Allied+Electronics, Data Rate=480Mbps, Interface=USB,UART, Manufacturer Part Number 1=FT234XD-T, Mount="Surface Mount", Number of Channels=1, Number of Pins=12, Packaging=Tray, Pricing 1="1=2.04000, 25=1.97000, 100=1.90000, 250=1.71000, 500=1.54002, 1000=1.46001, 2500=1.43750 (USD)", RoHS=Yes, Stock 1=2438, Supplier 1=Digi-Key

## Via types
v1: diameter 20, hole 10, Top Layer to Bottom Layer, tented both sides, 131 vias

## Nets (pads, with @x,y where several pads share a name; then routed paths per layer and width w, separated by ;. In a path a pad name is that pad's centre, name@x,y a point inside that pad or via, vN(x,y) a via of type N, cw(c..) or ccw(c..) an arc to the next point about the centre after c; other vN are vias at no path point)
3V3: C1.2 TP2.1 U1.3
5V_OUT: D9.1 J1.A4 J1.A9 J1.B4 J1.B9 Q1.1 Q1.2 Q1.5 Q1.6 Q1.8 TP10.1 | length 323.3
  Top Layer w8.03: J1.A4 77.52,531.5 78.73,530.29 ; J1.A9 82.49,629.92
  Bottom Layer w8.03: J1.B9 78.07,531.5 78.73,530.84 ; J1.B4 82.59,629.92
  other v1: 405.51,496.06 440.94,496.06 476.38,496.06 511.81,496.06 547.24,496.06 582.68,496.06 131,505 167,505 409.45,653.54 444.88,653.54 484.25,653.54
CC1: J1.A5 R1.2 R3.1 | length 511.5
  Top Layer w8.03: J1.A5 83.82,551.18 85.55,549.45 100.55,549.45 120,530 165,530 174,539 291,539 292,538 R1.2@311,538 ; R1.2 329.54,521.46 329.54,512.29 v1(331.83,510) ; v1(400,440) R3.1
  Bottom Layer w8.03: v1(331.83,510) 331.83,508.17 340.73,499.27 345.43,494.53 365,475 374.77,475 389.25,460.52 389.25,450.75 v1(400,440)
CC2: J1.B5 R2.2 R4.1 | length 594.1
  Top Layer w8.03: v1(260,445) 263.24,445 279.38,428.86 303.86,428.86 R4.1 ; v1(280,615) R2.2
  Bottom Layer w8.03: J1.B5 39.37,610.24 39.61,610 107.37,610 120.37,623 152,623 160,615 v1(280,615) 305,590 305,525 260,480 v1(260,445)
GND: C1.1 C2.1 C3.1 C4.1 C5.1 C6.1 D2.2 D3.2 D4.2 D5.2 D6.2 D7.2 D8.2 D9.2 J1.A1 J1.A12 J1.B1 J1.B12 J2.5 J3.5 J4.4 J4.6 J4.8 J4.10 J4.12 J4.14 J4.16 J4.18 J4.20 M1.1 M2.1 M3.1 M4.1 NT1.1 NT2.1 NT3.1 NT4.1 R3.2 R4.2 R6.2 TP9.1 U1.5 U1.13 | length 777.4
  Top Layer w8.03: J1.A12 55.63,688.98 v1(75.32,708.66) ; J1.A1@15.75,472.44 62.07,472.44 73.88,460.63 v1(77.12,460.63) ; 30,330 NT2.1@30,364.02 ; C2.1 1159.84,570 1229.33,639.49 1238.23,639.49 1243.94,645.2 1261.34,645.2 1266.43,640.11 U1.5 1266.43,583.57 U1.13 ; 1582.68,303.15 1615.08,303.15 1620.74,304.58 D6.2@1622.87,305.12 ; D5.2@1622.48,386.27 1622.48,411.95 ; 1850,565 NT3.1@1850,594.02 ; NT1.1@1905,573.86 1905,600
  Top Layer w10: U1.13 1307.54,542.46 v1(1316.89,542.46)
  Bottom Layer w8.03: J1.B1 55.63,688.98 v1(75.32,708.66) ; J1.B12@15.75,472.44 62.07,472.44 73.88,460.63 v1(77.12,460.63) ; NT4.1@33.45,777.89 35.43,779.87 35.43,811.02
  other v1: 259.84,102.36 338.58,102.36 417.32,102.36 653.54,102.36 732.28,102.36 1047.25,102.36 1125.99,102.36 1362.21,102.36 1440.95,102.36 1519.69,102.36 1598.43,102.36 1677.17,102.36 1755.91,102.36 141.73,181.1 220.47,181.1 299.21,181.1 377.95,181.1 1480.32,181.1 1559.06,181.1 1795.28,181.1 102.36,259.84 181.1,259.84 259.84,259.84 338.58,259.84 417.32,259.84 1519.69,259.84 1917.32,279.53 1480.32,338.58 1120.08,360.24 1229.33,361.22 994.05,362.35 1917.32,362.2 1314.96,363.19 240,375 1351,398 417.32,417.32 574.8,417.32 653.54,417.32 732.28,417.32 1598.43,417.32 1917.32,433.07 1542,471 1395,473 1607,477 1188.98,496.06 1141.73,519.68 1481,522 1269.68,542.32 1090.55,570.87 1269.68,570.87 1316.93,571.85 1453,603 974,618 907,708 1154.53,743.11 1204.72,743.11 1921.26,755.91 1389.76,834.65 1440,836 1516,843 1280,844 279.53,846.46 39.37,877.95 653.54,889.76 732.28,889.76 811.02,889.76 968.51,889.76 1917.32,893.7 1649,905 279.53,913.39 1280,930 1514,930 43.31,976.38 1700.79,1070.87 228.35,1074.8 275.59,1074.8 1051.18,1102.36 1165.35,1102.36 1275.59,1102.36 1389.76,1106.3 1649.61,1122.05 1748.03,1122.05 228.35,1129.92 275.59,1129.92
NetC6_2: C6.2 R5.2 U1.2 | length 98.5
  Top Layer w8.03: U1.2 1319.92,614.43 1319.92,634.92 C6.2 1342.5,662.5 1342.5,697.5 R5.2
NetJ1_A2: J1.A2 TP4.1 | length 305.4
  Top Layer w8.03: J1.A2 82.87,492.13 116.14,458.86 116.14,358.27 82.68,324.8 TP4.1
NetJ1_A3: J1.A3 TP5.1 | length 222.9
  Top Layer w8.03: J1.A3 83.19,511.81 115,480 196.71,480 203.68,486.97 TP5.1@206.84,486.97
NetJ1_A8: J1.A8 TP6.1 | length 226.5
  Top Layer w8.03: J1.A8 75,610.24 75,610 90,595 99.98,595 128.16,623.18 165.11,623.18 173.29,615 TP6.1@205,615
NetJ1_A10: J1.A10 TP7.1 | length 173.4
  Top Layer w8.03: J1.A10 104.61,649.61 120,665 157,665 TP7.1@157,675
NetJ1_ME1: J1.ME1 NT2.2 | length 68
  Top Layer w8.03: J1.ME1@27.56,444.88 27.56,421.26 30,418.82 NT2.2
NetJ1_ME2: J1.ME2 NT4.2 | length 53.8
  Bottom Layer w8.03: J1.ME2@22.44,715.35 35.43,728.35 NT4.2@35.43,763.78
NetJ2_6: J2.6 J2.7 J2.8 J2.9 NT1.2 | length 1549.4
  Top Layer w8.03: J2.7@1868.11,509.84 1870.83,509.84 1888.03,527.05 1888.03,532.21 1910,554.17 NT1.2
  Bottom Layer w8.03: J2.8@1718.5,210.63 1721.46,207.68 1865.16,207.68 1868.11,204.72 1868.11,483.27 ; J2.9@1718.5,503.94 1721.46,506.89 1865.16,506.89 J2.7@1868.11,509.84 ; J2.7@1868.11,506.89 J2.7@1868.11,509.84 ; J2.6@1871.06,181.1 J2.6@1871.06,207.68 ; 1871.06,480.32 1871.06,483.27 J2.6@1871.06,207.68 ; 1868.11,483.27 1868.11,480.32 1868.11,483.27 ; 1868.11,483.27 1868.11,207.68 1868.11,483.27 ; 1868.11,483.27 J2.7@1868.11,509.84 ; J2.6@1871.06,207.68 1871.06,204.72 J2.6@1871.06,207.68
NetJ3_6: J3.6 J3.7 J3.8 J3.9 NT3.2 | length 670.7
  Top Layer w8.03: NT3.2@1855.98,613.86 1867.13,625 1867.13,669.29 J3.6@1868.11,670.28
  Bottom Layer w8.03: J3.8@1718.5,676.18 1721.46,673.23 1865.16,673.23 1868.11,670.28 1868.11,975.39 1865.16,972.44 1721.46,972.44 J3.9@1718.5,969.49
NetQ1_3: Q1.3 R6.1 SW1.2
NetTP1_1: TP1.1 U1.6 | length 132
  Top Layer w8.03: TP1.1 1170.62,540.62 1184.27,540.62 1188.98,545.33 1188.98,574.8 1220.91,606.74 1247.87,606.74 U1.6@1247.87,616
nRESET: J1.B8 J4.15 | length 834.7
  Bottom Layer w8.03: J1.B8 95.82,551.18 115,532 215,532 236,511 236,436 333,339 594.86,339 J4.15@671.26,262.6
SWCLK: J1.B2 J4.9 | length 1161.6
  Bottom Layer w8.03: J1.B2 15.67,669.29 75.29,669.29 98.56,692.56 103.13,692.56 107.42,696.85 539.37,696.85 J4.9@971.26,264.96
SWDIO: J1.B3 J4.7 | length 1391.7
  Bottom Layer w8.03: J1.B3 15.67,649.61 78.61,649.61 109,680 537.79,680 826.77,391.02 826.77,236.22 853.82,209.17 1011.3,209.17 1064.74,262.6 J4.7@1071.26,262.6
UART_RX: D7.1 J1.B11 TP13.1 U1.10 | length 1670.1
  Top Layer w8.03: v1(149,416) 149,385 178.08,355.92 224.08,355.92 257.17,322.83 1334.83,322.83 1378,366 1378,439 1356,461 1321,461 1302.2,479.8 1302.2,499.57 U1.10
  Bottom Layer w8.03: J1.B11 39.37,492.13 39.53,491.97 73.03,491.97 v1(149,416)
UART_TX: D8.1 J1.B10 TP12.1 U1.7 | length 1309.8
  Top Layer w8.03: v1(149,453) 182.12,453 185.12,450 215,450 235,470 480,470 1244,470 1248.71,474.71 U1.7
  Bottom Layer w8.03: J1.B10 80.19,511.81 136.71,455.29 146.71,455.29 v1(149,453)
USB_FTDI_N: D6.1 J2.2 U1.1 | length 611
  Top Layer w6.43: U1.1 1337.29,605.89 1338.87,604.31 1347.07,604.31 1370.98,580.39 1370.98,566.02 1387.09,549.92 1492.13,444.88 1526.06,410.94 cw(c1520.26,405.14) 1526.06,399.33 1515.09,388.35 ccw(c1520.9,382.54) 1515.09,376.73 ccw(c1520.9,382.54) 1526.7,376.73 1537.68,387.71 cw(c1543.49,381.9) 1549.3,387.71 cw(c1543.49,381.9) 1549.3,376.09 1538.32,365.12 ccw(c1544.13,359.31) 1538.32,353.5 ccw(c1544.13,359.31) 1549.94,353.5 1560.91,364.48 cw(c1566.72,358.67) 1572.53,364.48 1574.8,362.2 1601.19,335.82 1691.74,335.82 1695.87,331.69 J2.2@1718.5,331.69
USB_FTDI_P: D5.1 J2.3 U1.12 | length 552.4
  Top Layer w6.43: U1.12 1354.91,499.91 v1(1381,526) ; v1(1400.98,580.83) 1414.96,566.85 1414.96,538.21 1542.2,410.96 1582.88,370.29 1605.92,347.25 1691.74,347.25 1701.77,357.28 J2.3@1718.5,357.28
  Bottom Layer w6.43: v1(1381,526) 1381,526.41 1391.15,536.55 1391.15,570.28 1400,579.13 v1@1400,580.83
USB_TYPEC_N: J1.A7 J3.2 | length 2056.4
  Top Layer w6.43: J1.A7 3.99,586.56 25.11,586.56 25.24,586.42 75.72,586.42 78.74,586.42 85.65,579.51 87.3,579.51 87.81,579 119.78,579 121.17,577.61 145.89,577.61 151,572.49 718.25,572.49 722.02,576.26 767,576.26 780.78,576.26 785.38,576.26 792.19,576.26 820.46,576.26 834.6,576.26 848.73,576.26 870.47,597.99 884.36,611.88 cw(c890.16,606.07) 895.97,611.88 901.32,606.53 ccw(c907.13,612.34) 912.94,606.53 ccw(c907.13,612.34) 912.94,618.15 907.59,623.5 cw(c913.4,629.31) 907.59,635.12 cw(c913.4,629.31) 919.21,635.12 924.55,629.77 ccw(c930.36,635.58) 936.17,629.77 ccw(c930.36,635.58) 936.17,641.38 930.82,646.73 cw(c936.63,652.54) 930.82,658.35 cw(c936.63,652.54) 942.44,658.35 947.79,653 ccw(c953.6,658.81) 959.4,653 ccw(c953.6,658.81) 959.4,664.62 954.05,669.96 cw(c959.86,675.77) 954.05,681.58 977.24,704.76 991.43,718.95 991.43,830.27 1043.43,882.27 1599.61,882.27 1673.62,808.26 1691.74,808.26 1702.76,797.24 J3.2@1718.5,797.24
USB_TYPEC_P: J1.A6 J3.3 | length 1985.4
  Top Layer w6.43: J1.A6 3.99,574.86 25.11,574.86 25.24,574.99 70.99,574.99 74.01,574.99 80.92,568.08 82.56,568.08 83.08,567.57 104.43,567.57 116.04,555.96 129.04,555.96 v1(130,555) ; v1@145,596 154,596 166.08,583.92 713.52,583.92 717.29,587.69 767,587.69 780.78,587.69 785.38,587.69 792.19,587.69 844,587.69 980,723.69 980,835 1038.7,893.7 1604.34,893.7 1678.35,819.69 1691.74,819.69 1694.88,822.83 J3.3@1718.5,822.83
  Bottom Layer w6.43: v1@132.6,557.6 132.6,564.43 136,567.83 136,590 136.55,590.55 136.55,591.81 140,595.26 v1@140,596
  other v1: 142.66,599.32
VBUS1: C2.2 C3.2 C4.2 D1.1 D2.1 J2.1 R5.1 TP3.1 U1.4 | length 313
  Top Layer w8.03: C2.2 1137.48,612.48 1153.17,612.48 1164.7,624.02 1194.14,624.02 1200,629.87 C3.2@1200,653.5 ; C3.2@1199.13,653.54 C3.2@1200.59,655 ; C3.2 C3.2@1204.06,660.43 ; C3.2@1205.94,659.45 1272.64,659.45 1274.61,657.48 1275.92,657.48 1283.8,649.61 1283.8,614.43 U1.4 ; 1718.5,277.56 1718.5,306.1 1779.53,306.1
VBUS2: D1.2 D4.1 J3.1 Q1.4 Q1.7 SW1.4 TP11.1 | length 99.4
  Top Layer w8.03: 1718.5,737.2 1718.5,771.65 1783.46,771.65
VBUS_5V: D1.3 R1.1 R2.1 TP8.1
  other v1: 645.67,511.81 787.4,515.75 850.39,515.75 708.66,673.23 775.59,673.23 838.58,673.23 1482,743 1462,788 1520,790
VSENSE: C5.2 D3.1 J1.A11 J4.1 TP14.1 U1.9
  other v1: 998.08,424.08 910,425 955,425 1040,425 1085,425 1130,425 209,816 150,818 150,866 210,867 208.66,913.39 150,914 208.66,960.63 150,962
pads on no net: J2.0 J2.4 J3.0 J3.4 J4.2 J4.3 J4.5 J4.11 J4.13 J4.17 J4.19 SW1.1 SW1.3 U1.8 U1.11

## Polygon pours and split planes (outlines as drawn)
GND on Top Layer "Top Layer-GND" (solid, pour order 77): 0,413.39 0,118.11 ccw(c118.11,118.11) 118.11,0 1850.39,0 ccw(c1850.4,118.11) 1968.5,118.11 1968.5,1062.99 ccw(c1850.4,1062.99) 1850.39,1181.1 118.11,1181.1 ccw(c118.11,1062.99) 0,1062.99 0,751.97
VBUS2 on Top Layer "Top Layer-VBUS2" (solid, pour order 61): 311.02,1011.81 311.02,1003.94 397.64,1003.94 440.94,960.63 1630.9,960.63 1687.01,904.53 1687.01,792 1554,792 1554,698 1720.26,698 1720.17,701.77 1881.89,701.77 1881.89,850.37 1881.89,980.32 1811.02,1051.18 732.28,1051.18 732.28,1145.67 303.15,1145.67 303.15,1011.81
NetQ1_3 on Top Layer "Top Layer-NetQ1_3" (solid, pour order 60): 503.94,905.51 618.11,905.51 618.11,952.76 618.11,1035.43 452.76,1035.43 452.76,1047.24 448.82,1051.18 401.57,1051.18 401.57,1017.72 401.43,940.94 503.94,940.94
5V_OUT on Top Layer "Top Layer-5V_OUT" (solid, pour order 49): -15.75,510 100,510 132.91,477.09 602.33,476.92 602.42,519.68 338.61,519.69 338.6,637.8 421.26,637.8 421.26,633.86 504.61,633.86 503.94,634.61 503.94,763.78 440.92,763.78 440.98,1008.86 307,1008.86 307,684 -15.75,684
VSENSE on Top Layer "Top Layer-VSENSE" (solid, pour order 48): -78.74,657.3 112.3,657.3 130,675 143,675 144.77,673.23 192.91,673.23 192.91,736.22 185.04,744.09 143,744.09 143,797.24 255.91,797.24 255,798.15 255,1003.94 65,1003.94 65,680 -78.74,680
3V3 on Top Layer "3V3_L01_P005" (solid, remove dead copper, pour order 5): 1319.57,614.09 1320,614.51 1320,675 1280,675 1275,680 1275,708.66 1216.34,708.66 1150,708.66 1150,669.29 1215.71,669.29 1230,655 1265,655 1301.86,618.14 1301.86,614.09
VBUS1 on Top Layer "Top Layer-VBUS1" (solid, pour order 64): 1171.62,806.62 1201.26,806.62 1270,737.87 1270,685 1280,675 1420,675 1709.15,433.02 1709.15,277.56 1625.56,277.56 1613,265 1613,225 1746,225 1746,252 1819.88,252 1819.88,440.12 1819,441 1819,589.57 1629.92,589.57 1629.92,688.98 1562.99,688.98 1562.99,614.17 1377.17,800 1335,800 1285,800 1235,850 1000,850 1000,640 1050,590 1160,590 1160,640 1110,640 1110,745
VBUS_5V on Top Layer "VBUS_5V_L01_P063" (solid, pour order 63): 330.71,700.79 330.71,480.32 881.89,480.32 881.89,700.79
VSENSE on Top Layer "VSENSE_L01_P017" (solid, remove dead copper, pour order 17): 1266.43,499.91 1301.86,499.91 1301.86,402.86 881.89,402.86 881.89,459 1237,459 1266.43,488.43
VBUS_5V on Top Layer "VBUS_5V_L01_P062" (solid, pour order 62): 1549,685.04 1480.31,685.04 1480.32,704.72 1429.13,704.72 1429.13,814.96 1549,814.96
GND on Bottom Layer "Bottom Layer-GND" (solid, remove dead copper, pour order 79): 0,118.52 ccw(c118.1,118.11) 118.11,0 1850.39,0 ccw(c1850.4,118.1) 1968.5,118.11 1968.5,1062.99 ccw(c1850.4,1062.99) 1850.39,1181.1 118.11,1181.1 ccw(c118.1,1063) 0,1062.57
5V_OUT on Bottom Layer "Bottom Layer-5V_OUT" (solid, remove dead copper, pour order 41): 93,467 270,467 331,406 293.41,443.59 598.43,443.59 598.43,673.23 190,673.23 190,649.14 -16.45,649.78 -15.54,496 32,496 39.61,488.39 39.61,467
VSENSE on Bottom Layer "Bottom Layer-VSENSE" (solid, remove dead copper, pour order 31): 866,197 1452,197 1452,359.02 1338.58,472.44 1157.56,472.44 920,710 660,710 557.01,812.99 255,812.99 255,1000 65,1000 65,780 135,780 135,750 135,680 560,680 866,374
GND on Mid Layer 2 "Mid Layer 2-GND" (solid, remove dead copper, pour order 85): 0,411.42 0,118.11 ccw(c118.11,118.11) 118.11,0 1850.39,0 ccw(c1850.4,118.11) 1968.5,118.11 1968.5,1062.99 ccw(c1850.39,1062.99) 1850.39,1181.1 118.11,1181.1 ccw(c118.11,1062.99) 0,1062.99 0,750 -68.9,750 ccw(c-68.9,740.16) -78.74,740.16 -78.74,710.63 cw(c-88.58,710.63) -88.58,700.79 -107.48,700.79 ccw(c-107.48,690.95) -117.32,690.94 -117.32,470.47 ccw(c-107.48,470.47) -107.48,460.63 -88.58,460.63 cw(c-88.58,450.79) -78.74,450.79 -78.74,421.26 ccw(c-68.9,421.26) -68.9,411.42
VBUS_5V on Mid Layer 2 "VBUS_5V_L03_P025" (solid, pour order 25): 1551.18,679.54 1551.18,814.96 614.17,814.96 614.17,649.61 614.17,480.32 968.5,480.32 968.5,679.49
GND on Mid Layer 1 "Mid Layer 1-GND" (solid, remove dead copper, pour order 81): 0,118.11 ccw(c118.11,118.11) 118.11,0 1850.39,0 ccw(c1850.39,118.11) 1968.5,118.11 1968.5,1062.99 ccw(c1850.39,1062.99) 1850.39,1181.1 118.11,1181.1 ccw(c118.11,1062.99) 0,1062.99 0,750 -68.9,750 ccw(c-68.9,740.16) -78.74,740.16 -78.74,710.63 cw(c-88.58,710.63) -88.58,700.79 -107.48,700.79 ccw(c-107.48,690.95) -117.32,690.94 -117.32,470.47 ccw(c-107.48,470.47) -107.48,460.63 -88.58,460.63 cw(c-88.58,450.79) -78.74,450.79 -78.74,421.26 ccw(c-68.9,421.26) -68.9,411.42 0,411.42

## Silkscreen, mask and mechanical layers (free items; w line width, h text height)
Top Overlay:
  text "USB" at 1610,1040 h30
  text "Type-C Debug Adapter Board Rev B" at 996.87,882.27 h28
  text "REMOVE USB  / VBUS" at 468.36,771.65 h30
  text "DEBUG UART" at 1483,571 h30
  text "SWD" at 687.13,427.29 h30
Board Outline:
  lines w3.94: 0,421.26 0,411.42 0,118.11 ccw(c118.11,118.11) 118.11,0 1850.39,0 ccw(c1850.39,118.11) 1968.5,118.11 1968.5,1062.99 ; 0,740.16 0,750 0,1062.99 ; 0,1062.99 cw(c118.11,1062.99) 118.11,1181.1 1850.39,1181.1 cw(c1850.39,1062.99) 1968.5,1062.99 ; 0,1062.99 0,1062.99 ; 1968.5,1062.99 1968.5,1062.99